# EAGLE board Buck Converter Board (EAGLE 9.1.3)

Size 160 x 100 mm. Coordinates in mm from the lower left corner, seen from the top.
Outline: 0,0 160,0 160,100 0,100 0,0
Copper layers (1*16): Top 0.035mm / dielectric 1.5mm / Bottom 0.035mm
Design rules "default": minimum track width 6mil, minimum drill 0.35mm, track to track 6mil, track to pad 6mil, pad to pad 6mil, via to via 6mil, smd to smd 6mil, copper to edge 40mil, drill to drill 6mil, minimum pad ring 10mil, minimum via ring 8mil, stop-mask expansion 4mil, vias tented up to drill 0mil, thermal gap 10mil

## Footprints (pad centres in the part's own frame; a part is rotated, then mirrored left to right if it is on the bottom)
C0805 = smd 1.3 x 1.5: 1 -0.95,0; 2 0.95,0
SMB = smd 2.4 x 2.4: A 2.2,0; C -2.2,0
FUSE_HOLDER_5X20MM = drill 1.422 pad 2.286 square: 1 0,0; 2 15.24,0
POWERPOLE_PAIR_25A_HORIZ_G2 = drill 1.8 long: BLACK -3.95,-7.1; RED 3.95,-7.1

## Placement (x,y rotation side)
C1  [C0805]  138.43,52.07 0 top
D1  [SMB]  59.69,73.66 0 top
F1  FUSEBLANK_5X20MM  [FUSE_HOLDER_5X20MM]  40.64,30.48 90 top
J1  POWERPOLE_POWER25A_HORIZONTAL_G2  [POWERPOLE_PAIR_25A_HORIZ_G2]  -1.27,50.8 90 top
J2  POWERPOLE_POWER25A_HORIZONTAL_G2  [POWERPOLE_PAIR_25A_HORIZ_G2]  143.51,80.01 0 top

## Library data of the parts
C1 = rcl; SPICEPREFIX: C
D1 = diode
F1 = fuse; OC_FARNELL: unknown; OC_NEWARK: unknown
J1 J2 = powerpoles

## Nets
N$1: F1.1 J1.RED
N$2: F1.2
N$3: J1.BLACK
N$4: J2.RED
N$5: C1.1
N$6: C1.2 J2.BLACK
N$11: D1.C
N$12: D1.A

## Tracks (layer width: path | path; a pad name or v marks a point on that pad's centre or on a via)
N$1  (1 unrouted)
N$6  (1 unrouted)